# Altium PCB 32旋转LED主控板子.PcbDoc
Units mil, origin at the board's own origin, x right, y up, seen from the top; angles counter-clockwise.
Board outline 6880 x 1150 mil, 2 copper layers (Top Layer, Bottom Layer); 82 components, 72 nets, 221 pads, 27 vias.
Unrouted connection lines stored in the file: 2.
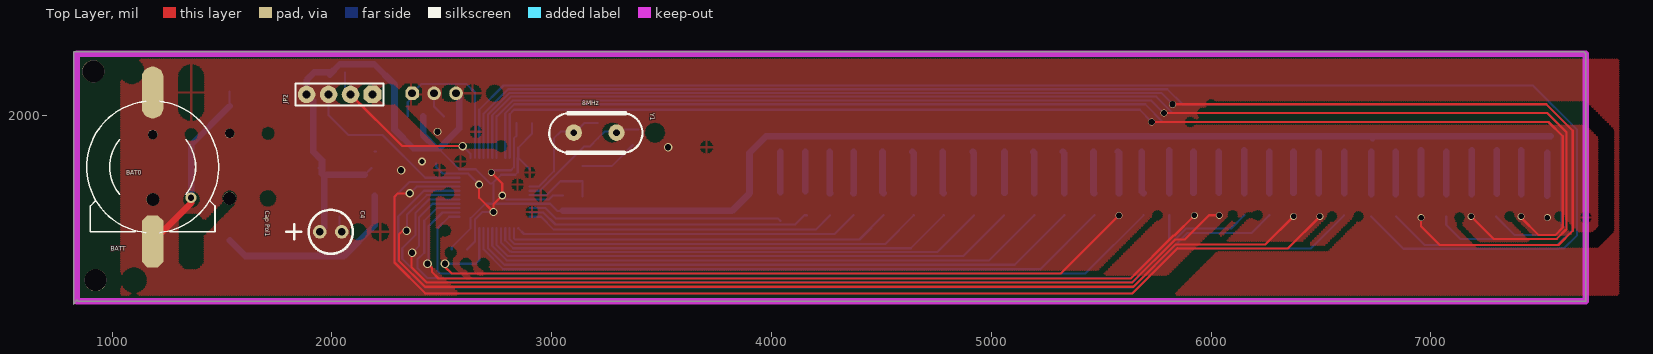
[diagram p0: Top Layer view]
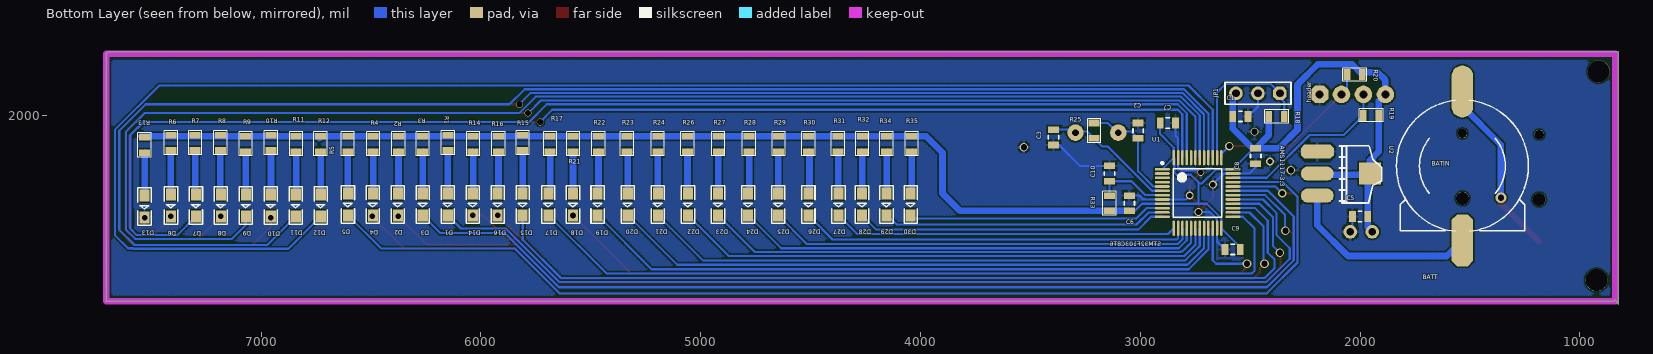
[diagram p1: Bottom Layer view, seen from below]

## Layer stack, top to bottom
Top Solder: solder mask 0.4, Solder Resist, Dk 3.5
Top Layer: signal copper 1.4
Dielectric 1: dielectric 12.6, FR-4, Dk 4.8
Bottom Layer: signal copper 1.4
Bottom Solder: solder mask 0.4, Solder Resist, Dk 3.5

## Board outline
840,1160 845,1155 7705,1155 7705,2280 7695,2290 825,2290 825,1140

## Design rules (kind name [scope] priority, off if disabled: settings)
Clearance Clearance_1 [All] p1: gap=7
Clearance [InNet('GND')] p2: gap=20
PolygonConnect [All] p1: connectstyle=Relief reliefconductorwidth=10 reliefentries=4 polygonreliefangle="90 Angle" airgapwidth=10
RoutingVias [All] p1: holewidth=28 width=31.5 viastyle="Through Hole" minholewidth=19.68 minwidth=23.62 maxholewidth=28 maxwidth=39.37
SolderMaskExpansion [All] p1: expansion=4
Width [All] p1: maxlimit=30 minlimit=10 preferedwidth=30
29 further rules are at their usual default settings.

## Components (designator, comment, footprint, x,y, rotation, side; value= is the part's Value field where it differs from the comment)
BAT0 "BATT" BATM 1185,1765 r0 top
BATIN "BATT" BATM 1535,1770 r180 bottom
C1 "Cap" 0805_C 2545,1995 r180 bottom
C2 "Cap" 0805_C 3010,1930 r270 bottom
C3 "Cap" 0805_C 3395,1900 r90 bottom
C4 "Cap Pol1" 10UF 1945,1470 r0 top
C5 "Cap" 0805_C 2000,1540 r180 bottom
C6 "Cap" 0805_C 3050,1600 r270 bottom
C7 "Cap" 0805_C 2875,1965 r0 bottom
C8 "Cap" 0805_C 2475,1815 r90 bottom
C9 "Cap" 0805_C 2580,1390 r180 bottom
C10 "Cap" 0805_C 3140,1735 r90 bottom
D1 "LED" 0805_LED 6150.71,1595 r270 bottom
D2 "LED" 0805_LED 6377.86,1595 r270 bottom
D3 "LED" 0805_LED 6264.29,1595 r270 bottom
D4 "LED" 0805_LED 6491.43,1595 r270 bottom
D5 "LED" 0805_LED 6605,1595 r270 bottom
D6 "LED" 0805_LED 7410,1590 r270 bottom
D7 "LED" 0805_LED 7296.43,1590 r270 bottom
D8 "LED" 0805_LED 7182.86,1590 r270 bottom
D9 "LED" 0805_LED 7069.29,1590 r270 bottom
D10 "LED" 0805_LED 6955.71,1590 r270 bottom
D11 "LED" 0805_LED 6842.14,1590 r270 bottom
D12 "LED" 0805_LED 6728.57,1590 r270 bottom
D13 "LED" 0805_LED 7530,1585 r270 bottom
D14 "LED" 0805_LED 6037.14,1595 r270 bottom
D15 "LED" 0805_LED 5810,1595 r270 bottom
D16 "LED" 0805_LED 5923.57,1595 r270 bottom
D17 "LED" 0805_LED 5693,1595 r270 bottom
D18 "LED" 0805_LED 5581,1595 r270 bottom
D19 "LED" 0805_LED 5469,1595 r270 bottom
D20 "LED" 0805_LED 5332,1595 r270 bottom
D21 "LED" 0805_LED 5195,1595 r270 bottom
D22 "LED" 0805_LED 5058,1595 r270 bottom
D23 "LED" 0805_LED 4921,1595 r270 bottom
D24 "LED" 0805_LED 4784,1595 r270 bottom
D25 "LED" 0805_LED 4647,1595 r270 bottom
D26 "LED" 0805_LED 4510,1595 r270 bottom
D27 "LED" 0805_LED 4373,1595 r270 bottom
D28 "LED" 0805_LED 4266,1595 r270 bottom
D29 "LED" 0805_LED 4155,1595 r270 bottom
D30 "LED" 0805_LED 4045,1595 r270 bottom
JP1 "header" header3 2365,2100 r0 bottom
JP2 "header" header4 2185,2095 r180 top
R1 "Res2" 0805_R 6150,1875 r90 bottom
R2 "Res2" 0805_R 6375,1870 r90 bottom
R3 "Res2" 0805_R 6265,1870 r90 bottom
R4 "Res2" 0805_R 6490,1870 r90 bottom
R5 "Res2" 0805_R 6605,1870 r90 bottom
R6 "Res2" 0805_R 7410,1875 r90 bottom
R7 "Res2" 0805_R 7300,1875 r90 bottom
R8 "Res2" 0805_R 7185,1875 r90 bottom
R9 "Res2" 0805_R 7070,1870 r90 bottom
R10 "Res2" 0805_R 6955,1875 r90 bottom
R11 "Res2" 0805_R 6840,1870 r90 bottom
R12 "Res2" 0805_R 6730,1870 r90 bottom
R13 "Res2" 0805_R 7530,1865 r90 bottom
R14 "Res2" 0805_R 6035,1870 r90 bottom
R15 "Res2" 0805_R 5810,1875 r90 bottom
R16 "Res2" 0805_R 5920,1870 r90 bottom
R17 "Res2" 0805_R 5685,1870 r90 bottom
R18 "Res2" 0805_R 2380,1995 r180 bottom
R19 "Res2" 0805_R 1950,2000 r180 bottom
R20 "Res2" 0805_R 2025,2185 r180 bottom
R21 "Res2" 0805_R 5580,1870 r90 bottom
R22 "Res2" 0805_R 5465,1870 r90 bottom
R23 "Res2" 0805_R 5335,1870 r90 bottom
R24 "Res2" 0805_R 5195,1870 r90 bottom
R25 "Res2" 0805_R 3210,1930 r90 bottom
R26 "Res2" 0805_R 5060,1870 r90 bottom
R27 "Res2" 0805_R 4920,1870 r90 bottom
R28 "Res2" 0805_R 4780,1870 r90 bottom
R29 "Res2" 0805_R 4645,1870 r90 bottom
R30 "Res2" 0805_R 4510,1870 r90 bottom
R31 "Res2" 0805_R 4375,1870 r90 bottom
R32 "Res2" 0805_R 4265,1870 r90 bottom
R33 "Res2" 0805_R 3140,1600 r90 bottom
R34 "Res2" 0805_R 4155,1870 r90 bottom
R35 "Res2" 0805_R 4040.5,1870 r90 bottom
U1 "STM32F103C8T6" LQFP48 2740,1645 r180 bottom
U2 "AMS1117-3.3" AMS1117 2195,1835 r270 bottom
Y1 "8MHz" XTAL_2 3185,1920 r0 top

## Footprints (in the part's own frame and the unit in brackets; to place one, negate y for a bottom-side part, rotate by r counter-clockwise, add the part's x,y. Pads: shape width x height; smd on the part's side, far side on the other; paste and mask are expansions set on the pad)
10UF [mil]
  round 62 hole 35.43: 1(0,0) 2(100,0)
  silkscreen extent -152,-100 150,100
0805_C [mil]
  rect 30x50 smd: 1(-35,0) 2(35,0)
  silkscreen extent -8,-24 8,24, body extent -39,-24 39,24, height 22
0805_LED [mil]
  rect 55.12x46 smd: 1(-50,0) 2(50,0)
  silkscreen extent -85,-30 85,30, body extent -40,-25 40,25, height 43
0805_R [mil]
  rect 30x50 smd: 1(-35,0) 2(35,0)
  silkscreen extent -55,-30 55,30
AMS1117 [mil]
  oct 65x150 smd: 1(0.03,-0.06)
  oval 65x150 smd: 2(100.03,-0.06) 3(200.03,-0.06)
  rect 100x100 smd: 4(100.03,239.94)
  silkscreen extent -26,100 234,293
BATM [mm]
  round 1.1 hole 1.1 unplated: 0(0,3.748)
  round 1.5 hole 1.5 unplated: 0(0.025,-3.752)
  oct 2.5x6 smd: 1(0,-8.602)
  oval 2.5x6 smd: 2(0,8.598)
  silkscreen extent -7.62,-7.58 7.62,7.57
header3 [mil]
  oct 62x62 hole 35: 1(0,0)
  round 62 hole 35: 2(100,0) 3(200,0)
  silkscreen extent -50,-50 250,50, body extent -50,-50 250,50, height 398
header4 [mil]
  oct 80x80 hole 36: 1(0,0)
  round 80 hole 36: 2(100,0) 3(200,0) 4(300,0)
  silkscreen extent -50,-50 350,50, body extent -50,-50 350,50, height 398
LQFP48 [mm]
  oval 1.75x0.3 smd: 1(-4.064,2.794) 2(-4.064,2.294) 3(-4.064,1.794) 4(-4.064,1.294) 5(-4.064,0.794) 6(-4.064,0.294) 7(-4.064,-0.206) 8(-4.064,-0.706) 9(-4.064,-1.206) 10(-4.064,-1.706) 11(-4.064,-2.206) 12(-4.064,-2.706) 25(4.086,-2.706) 26(4.086,-2.206) 27(4.086,-1.706) 28(4.086,-1.206) 29(4.086,-0.706) 30(4.086,-0.206) 31(4.086,0.294) 32(4.086,0.794) 33(4.086,1.294) 34(4.086,1.794) 35(4.086,2.294) 36(4.086,2.794)
  oval 0.3x1.75 smd: 13(-2.739,-4.031) 14(-2.239,-4.031) 15(-1.739,-4.031) 16(-1.239,-4.031) 17(-0.739,-4.031) 18(-0.239,-4.031) 19(0.261,-4.031) 20(0.761,-4.031) 21(1.261,-4.031) 22(1.761,-4.031) 23(2.261,-4.031) 24(2.761,-4.031) 37(2.761,4.119) 38(2.261,4.119) 39(1.761,4.119) 40(1.261,4.119) 41(0.761,4.119) 42(0.261,4.119) 43(-0.239,4.119) 44(-0.739,4.119) 45(-1.239,4.119) 46(-1.739,4.119) 47(-2.239,4.119) 48(-2.739,4.119)
  silkscreen extent -4.19,-2.76 2.81,3.62, body extent -4.5,-4.44 4.5,4.56, height 1.56
XTAL_2 [mil]
  round 75 hole 30: 1(-84.92,1.38) 2(110.08,1.38)
  silkscreen extent -196,-90 228,89, body extent -213,-90 233,93, height 138

## Part data
BAT0 BATIN: library part BAT
C1 C2 C3 C5 C6 C7 C8 C9 C10: "Capacitor"
C4: "Polarized Capacitor (Radial)"
D1 D2 D3 D4 D5 D6 D7 D8 D9 D10 D11 D12 D13 D14 D15 D16 D17 D18 D19 D20 D21 D22 D23 D24 D25 D26 D27 D28 D29 D30: "LED 发光二极管"
JP1: library part "HEADER 3"
JP2: library part "HEADER 4"
R1 R2 R3 R4 R5 R6 R7 R8 R9 R10 R11 R12 R13 R14 R15 R16 R17 R18 R19 R20 R21 R22 R23 R24 R25 R26 R27 R28 R29 R30 R31 R32 R33 R34 R35: "Resistor"
U1: "STM32 ARM-based 32-bit MCU with 64 Kbytes Flash, 48-pin LQFP, Industrial Temperature"
U2: library part AMS1117
Y1: library part XTAL, "Crystal Oscillator"

## Free pads (board coordinates)
  round 100 hole 100: 0(915,2200) 1(925,1250)

## Via types
v1: diameter 31.5, hole 25, Top Layer to Bottom Layer, 9 vias
v2: diameter 39.37, hole 28, Top Layer to Bottom Layer, 5 vias
v3: diameter 31.5, hole 28, Top Layer to Bottom Layer, 4 vias
v4: diameter 38, hole 28, Top Layer to Bottom Layer, 2 vias
v5: diameter 50, hole 28, Top Layer to Bottom Layer, 1 vias
v6: diameter 39.37, hole 24, Top Layer to Bottom Layer, 1 vias
v7: diameter 35.43, hole 25, Top Layer to Bottom Layer, 1 vias
v8: diameter 35, hole 28, Top Layer to Bottom Layer, 1 vias
v9: diameter 35, hole 24, Top Layer to Bottom Layer, 1 vias
v10: diameter 35.43, hole 24, Top Layer to Bottom Layer, 1 vias
v11: diameter 35.43, hole 28, Top Layer to Bottom Layer, 1 vias

## Nets (pads, with @x,y where several pads share a name; then routed paths per layer and width w, separated by ;. In a path a pad name is that pad's centre, name@x,y a point inside that pad or via, vN(x,y) a via of type N, cw(c..) or ccw(c..) an arc to the next point about the centre after c; other vN are vias at no path point)
GND: BAT0.2 C1.2 C2.1 C3.1 C4.2 C5.1 C6.1 C7.1 C8.1 C9.1 C10.2 D13.2 JP1.2 JP2.1 U1.8 U1.23 U1.35 U1.47 U2.1 | length 1929.4
  Top Layer w10: v7(2670,1685) 2670,1625 v8(2735,1560) 2735,1595 v9(2775,1635) 2775,1690 v1(2725,1740)
  Bottom Layer w10: C5.1 2035,1480 C4.2 ; U2.1 U2.1@2200.5,1834.97 ; JP1.2 2465,2040 C1.2 ; C8.1 2475,1765.32 2505,1735.32 U1.35 2619.68,1735.32 v7(2670,1685) ; C9.1 2650.99,1425.99 U1.23 2650.99,1526.95 2684.04,1560 v8(2735,1560) ; v1(2725,1740) 2735,1750 2815,1750 2828.15,1763.15 U1.47 2828.15,1895 2840,1906.85 C7.1 ; v9@2785,1625 2792.79,1617.21 U1.8 2987.21,1617.21 3005,1635 C6.1 ; C10.2 3275,1770 C3.1@3370,1865
  other v1: 7530,1535
  other v4: 2315,1750 3530,1855
  other v10: 2410,1790
  other v11: 2480,1925
NetBAT0_1: BAT0.1 BATIN.2 | length 827.1
  Top Layer w10: v5@1360,1601.35 v5(1360,1625)
  Top Layer w30: BAT0.1 v5@1360,1601.35
  Bottom Layer w10: BATIN.2@1535,2041.35 BATIN.2
  Bottom Layer w30: v5(1360,1625) 1360,1866.35 BATIN.2@1535,2041.35
NetBATIN_1: BATIN.1 U2.3 | length 882.5
  Bottom Layer w30: BATIN.1 1606.35,1360 2055,1360 2195.06,1500.06 U2.3
NetD1_1: D1.1 R1.1 | length 194.3
  Bottom Layer w30: D1.1@6150,1645.72 R1.1
NetD2_1: D2.1 R2.1 | length 187.1
  Bottom Layer w30: D2.1@6375,1647.86 R2.1
NetD3_1: D3.1 R3.1 | length 189.3
  Bottom Layer w30: D3.1@6265,1645.71 R3.1
NetD4_1: D4.1 R4.1 | length 188.6
  Bottom Layer w30: D4.1@6490,1646.43 R4.1
NetD5_1: D5.1 R5.1 | length 190
  Bottom Layer w30: D5.1 R5.1
NetD6_1: D6.1 R6.1 | length 200
  Bottom Layer w30: D6.1 R6.1
NetD7_1: D7.1 R7.1 | length 196.4
  Bottom Layer w30: D7.1@7300,1643.57 R7.1
NetD8_1: D8.1 R8.1 | length 197.9
  Bottom Layer w30: D8.1@7185,1642.14 R8.1
NetD9_1: D9.1 R9.1 | length 194.3
  Bottom Layer w30: D9.1@7070,1640.71 R9.1
NetD10_1: D10.1 R10.1 | length 199.3
  Bottom Layer w30: D10.1@6955,1640.72 R10.1
NetD11_1: D11.1 R11.1 | length 192.9
  Bottom Layer w30: D11.1@6840,1642.14 R11.1
NetD12_1: D12.1 R12.1 | length 193.6
  Bottom Layer w30: D12.1 R12.1@6728.57,1833.57
NetD13_1: D13.1 R13.1 | length 195
  Bottom Layer w30: D13.1 R13.1
NetD14_1: D14.1 R14.1 | length 187.9
  Bottom Layer w30: D14.1@6035,1647.14 R14.1
NetD15_1: D15.1 R15.1 | length 195
  Bottom Layer w30: D15.1 R15.1
NetD16_1: D16.1 R16.1 | length 186.4
  Bottom Layer w30: D16.1@5920,1648.57 R16.1
NetD17_1: D17.1 R17.1 | length 193.3
  Bottom Layer w30: R17.1 5685,1653 D17.1
NetD18_1: D18.1 R21.1 | length 192.5
  Bottom Layer w30: R21.1@5575,1835 5581,1829 D18.1
NetD19_1: D19.1 R22.1 | length 191.7
  Bottom Layer w30: R22.1 5465,1649 D19.1
NetD20_1: D20.1 R23.1 | length 192.9
  Bottom Layer w30: R23.1@5325,1835 5332,1828 D20.1
NetD21_1: D21.1 R24.1 | length 192.1
  Bottom Layer w30: R24.1@5190,1835 5195,1830 D21.1
NetD22_1: D22.1 R26.1 | length 188
  Bottom Layer w30: D22.1@5060,1647 R26.1
NetD23_1: D23.1 R27.1 | length 192.5
  Bottom Layer w30: R27.1@4915,1835 4921,1829 D23.1
NetD24_1: D24.1 R28.1 | length 191.7
  Bottom Layer w30: R28.1 4780,1649 D24.1
NetD25_1: D25.1 R29.1 | length 192.9
  Bottom Layer w30: R29.1@4640,1835 4647,1828 D25.1
NetD26_1: D26.1 R30.1 | length 192.1
  Bottom Layer w30: R30.1@4505,1835 4505,1650 D26.1
NetD27_1: D27.1 R31.1 | length 190.8
  Bottom Layer w30: D27.1 4375,1647 R31.1
NetD28_1: D28.1 R32.1 | length 190.4
  Bottom Layer w30: R32.1 4265,1646 D28.1
NetD29_1: D29.1 R34.1 | length 179.5
  Bottom Layer w30: D29.1@4154.5,1655.5 R34.1@4154.5,1835
NetD30_1: D30.1 R35.1 | length 185.5
  Bottom Layer w30: D30.1@4040.5,1649.5 R35.1
NRST: C10.1 R33.2 U1.7 | length 336.1
  Bottom Layer w10: U1.7 2976.9,1636.9 3040,1700 C10.1 R33.2@3140,1630
PA0: D30.2 U1.10 | length 1164
  Bottom Layer w10: U1.10 2972.16,1577.84 3020,1530 4030,1530 D30.2@4040,1520
PA1: D29.2 U1.11 | length 1300.2
  Bottom Layer w10: U1.11 2961.84,1558.16 3017,1503 4108,1503 4150,1545 D29.2@4160,1545
PA2: D28.2 U1.12 | length 1417.1
  Bottom Layer w10: U1.12 2951.53,1538.47 3010,1480 4201,1480 D28.2
PA3: D27.2 U1.13 | length 1571.3
  Bottom Layer w10: U1.13 2874.15,1460 4288,1460 D27.2
PA4: D26.2 U1.14 | length 1774.7
  Bottom Layer w10: U1.14 2828.15,1441.85 2835,1435 4400,1435 D26.2
PA5: D25.2 U1.15 | length 1951.1
  Bottom Layer w10: U1.15 2808.47,1436.53 2830,1415 4517,1415 D25.2
PA6: D24.2 U1.16 | length 2127.4
  Bottom Layer w10: U1.16 2788.78,1431.22 2825,1395 4634,1395 D24.2
PA7: D23.2 U1.17 | length 2304.3
  Bottom Layer w10: U1.17 2769.1,1420.9 2810,1380 2815.96,1380 2817.96,1378 4754,1378 D23.2
PA8: D1.2 U1.29 | length 4457.9
  Bottom Layer w10: U1.29 2442.21,1617.21 2380,1555 2380,1455 2320,1395 2320,1347.59 2426.5,1241.08 5642.3,1241.08 5886.21,1485 6090.72,1485 D1.2
PA9: D2.2 U1.30 | length 4761.2
  Top Layer w10: v2(2340,1475) 2322,1475 2305,1458 2305,1338.59 2423.59,1220 5646.67,1220 5839.54,1412.88 5854.46,1412.88 5855.46,1411.88 6246.88,1411.88 v1(6375,1540)
  Bottom Layer w10: v2(2340,1475) 2341.37,1476.37 2341.37,1546.37 2431.9,1636.9 U1.30
PA10: D3.2 U1.31 | length 4673.5
  Bottom Layer w10: U1.31 2418.91,1656.58 2302,1539.67 2302,1340 2424,1218 5644.67,1218 5891.67,1465 6184.29,1465 D3.2
PA11: D4.2 U1.32 | length 5027.1
  Top Layer w10: v6(2355,1645) 2300,1645 2285,1630 2285,1330 2425,1190 5642.12,1190 5847,1394.88 5848,1393.88 6348.88,1393.88 v1(6495,1540)
  Bottom Layer w10: v6(2355,1645) 2386.27,1676.27 U1.32
PA12: D5.2 U1.33 | length 5146.5
  Bottom Layer w10: U1.33 2350.95,1695.95 2285,1630 2285,1330 2425,1190 5642.12,1190 5846,1393.88 6453.88,1393.88 D5.2
PA13: JP2.3 R19.1 U1.34 | length 815.2
  Bottom Layer w10: JP2.3@2005,2095 1985,2075 R19.1 2075,1910 2230,1910 2424.36,1715.64 U1.34
PA14: JP2.2 R20.1 U1.37 | length 790.6
  Top Layer w10: JP2.2 2320,1860 v2(2595,1860) v2@2595,1855
  Bottom Layer w10: R20.1@2060,2195 2060,2120 JP2.2 ; v2(2595,1860) 2631.3,1823.7 U1.37
PA15: JP1.1 R18.2 U1.38 | length 730.1
  Bottom Layer w10: R18.2 2345,2060 2365,2080 JP1.1 2408,2143 2612,2143 2650.99,2104.01 U1.38
PB0: D22.2 U1.18 | length 2481.9
  Bottom Layer w10: U1.18 2749.41,1410.59 2800,1360 4873,1360 D22.2
PB1: D21.2 U1.19 | length 2658.3
  Bottom Layer w10: U1.19 2729.73,1405.27 2795,1340 4990,1340 D21.2
PB2: D20.2 U1.20 | length 2837.6
  Bottom Layer w10: U1.20 2710.04,1394.96 2785,1320 5107,1320 D20.2
PB3: D12.2 U1.39 | length 6844.2
  Bottom Layer w10: U1.39 2670.67,2025.67 2781,2136 7463.04,2136 7665,1934.04 7665,1455 7605,1395 7584.04,1395 7582.04,1393 6875.57,1393 D12.2
PB4: D11.2 U1.40 | length 6615.7
  Bottom Layer w10: U1.40 2690.36,2008.44 2800.92,2119 5801,2119 5870,2050 7525,2050 7645,1930 7645,1480 7575,1410 6972.14,1410 D11.2
PB5: D10.2 U1.41 | length 6490.8
  Top Layer w10: v3(5825,2050) 7525,2050 7645,1930 7645,1475 7580,1410 7040,1410 6955,1495 v1(6955,1535)
  Bottom Layer w10: U1.41 2710.04,2004.08 2807.96,2102 5773,2102 v3(5825,2050)
PB6: D9.2 U1.42 | length 6252.8
  Bottom Layer w10: U1.42 2729.73,1999.73 2815,2085 5750,2085 5825,2010 7530,2010 7615,1925 7615,1480 7573,1438 7132,1438 7069.29,1500.71 D9.2
PB7: D8.2 U1.43 | length 6080.2
  Top Layer w10: v3(5785,2010) 7530,2010 7617,1923 7617,1482.96 7572.04,1438 7284.86,1438 v1(7182.86,1540)
  Bottom Layer w10: U1.43 2749.41,1995.37 2751.29,1995.37 2822.92,2067 5728,2067 v3(5785,2010)
PB8: D7.2 U1.45 | length 5854.1
  Bottom Layer w10: U1.45 2788.78,2008.82 2829.96,2050 5700,2050 5780,1970 7535,1970 7595,1910 7595,1485 7565,1455 7381.43,1455 D7.2
PB9: D6.2 U1.46 | length 5704.7
  Top Layer w10: v3(5730,1970) 7535,1970 7600,1905 7600,1490 7565,1455 7490,1455 7410,1535 v1(7410,1540)
  Bottom Layer w10: U1.46 2809,1807.71 2809,2005 2829,2025 5675,2025 v3(5730,1970)
PB10: D19.2 U1.21 | length 3013.9
  Bottom Layer w10: U1.21 2690.36,1389.64 2780,1300 5224,1300 D19.2
PB11: D18.2 U1.22 | length 3511
  Top Layer w10: v2(2515,1325) 2515,1310 2545,1280 5316,1280 v3(5581,1545)
  Bottom Layer w10: v2(2515,1325) 2655,1325 2670.67,1340.67 U1.22
PB12: D17.2 U1.25 | length 3641.6
  Bottom Layer w10: U1.25 2533.47,1538.47 2480,1485 2480,1292.67 2492.67,1280 5428,1280 D17.2
PB13: D16.2 U1.26 | length 3983.2
  Top Layer w10: v2(2435,1325) 2455,1305 2455,1288.08 2485,1258.08 5633.84,1258.08 5828.76,1453 5833,1453 5923.57,1543.57 v1(5923.57,1545)
  Bottom Layer w10: v2(2435,1325) 2440,1330 2440,1495 2503.16,1558.16 U1.26
PB14: D15.2 U1.27 | length 4032.4
  Bottom Layer w10: U1.27 2477.84,1577.84 2420,1520 2420,1375 2390,1345 2390,1304.46 2434.46,1260 5635.76,1260 5810,1434.24 D15.2
PB15: D14.2 U1.28 | length 4280.1
  Top Layer w10: v2(2365,1375) 2362.02,1372.02 2362.02,1308.43 2430.46,1240 5641.21,1240 5836.21,1435 5880,1435 5990,1545 v1(6037.15,1545)
  Bottom Layer w10: v2(2365,1375) 2397,1407 2397,1537 2457.53,1597.53 U1.28
PC13: U1.2
PC14: U1.3
PC15: U1.4
PD0: C2.2 R25.2 U1.5 Y1.1 | length 517.5
  Bottom Layer w10: U1.5 2941.27,1676.27 3010,1745 3010,1810 C2.2 3041.38,1926.38 3110.08,1926.38 3148.7,1965 R25.2
PD1: C3.2 R25.1 U1.6 Y1.2 | length 598.1
  Bottom Layer w10: U1.6 2946.58,1656.58 3147.5,1857.5 3172.5,1857.5 R25.1 3241.38,1926.38 Y1.2@3305.08,1926.38 ; Y1.2@3313.7,1935 C3.2
VBAT: C1.1 C4.1 C5.2 C6.2 C7.2 C8.2 C9.2 JP1.3 JP2.4 R1.2 R2.2 R3.2 R4.2 R5.2 R6.2 R7.2 R8.2 R9.2 R10.2 R11.2 R12.2 R13.2 R14.2 R15.2 R16.2 R17.2 R18.1 R19.2 R20.2 R21.2 R22.2 R23.2 R24.2 R26.2 R27.2 R28.2 R29.2 R30.2 R31.2 R32.2 R33.1 R34.2 R35.2 U1.1 U1.9 U1.24 U1.36 U1.48 U2.2 U2.4 | length 8638.5
  Bottom Layer w10: U2.4@1940.06,1759.97 U2.4@1970.03,1730 ; C4.1 C4.1@1965,1490 ; U2.2@2150.1,1730 U2.2@2180.06,1759.97 ; C8.2@2484.15,1850 U1.36 2654.99,1755.01 2720,1690 2730,1690 2770,1730 2835,1730 2846.06,1741.06 2846.06,1805.39 U1.48 ; C9.2 2545,1400 U1.24 2631.3,1531.3 2697.53,1597.53 2735,1597.53 ; 2735,1695 2735,1597.53 ; U1.1 U1.48 ; C7.2 2910,1915 2847.84,1852.84 U1.48 ; C6.2 3025,1565 2992.47,1597.53 U1.9 2735,1597.53
  Bottom Layer w30: C4.1@1965,1490 C5.2 1965,1725.03 U2.4 1955.06,1794.94 1915,1835 1915,2065 JP2.4 1885,2160 1920,2195 R20.2@1990,2195 ; U2.4@1970.03,1730 U2.2@2150.1,1730 ; R20.2 1990,2186.11 2035.89,2232 2193,2232 2285,2140 2285,1935 2370,1850 C8.2 ; R18.1 2415,1910 C8.2 ; JP1.3 2580,2085 C1.1 2580,1940 2490,1850 2484.15,1850 C8.2 ; C6.2 R33.1@3135,1565 ; R33.1 3820,1565 3900,1645 3900,1830 3975,1905 R35.2 R31.2 R28.2 R22.2 R17.2 R12.2@6725,1905 ; R12.2@6735,1895 R12.2@6725,1905 ; R13.2@7545,1905 R12.2@6725,1905
pads on no net: BAT0.0 BATIN.0 U1.44

## Polygon pours and split planes (outlines as drawn)
GND on Top Layer "Top Layer-No Net" (hatched 90Degree grid 10 track 10, remove dead copper, pour order 18): 1035,2265 7860,2265 7865,2260 7865,1170 1030,1170 1035,1175 1035,2255
GND on Bottom Layer "Top Layer-No Net" (hatched 90Degree grid 10 track 10, remove dead copper, pour order 20): 855,2255 855,1190 865,1180 7685,1180 7685,2245 7680,2250 865,2250

## Keep-outs
Keep-Out Layer:
  lines w30: 840,1155 7705,1155 7705,2280 840,2280 840,1155